# Altium PCB PCB1.PcbDoc
Units mil, origin at the board's own origin, x right, y up, seen from the top; angles counter-clockwise.
Board outline 3275 x 2940 mil, 2 copper layers (Top Layer, Bottom Layer); 3 components, 9 nets, 61 pads, 0 vias.
Unrouted connection lines stored in the file: 12.
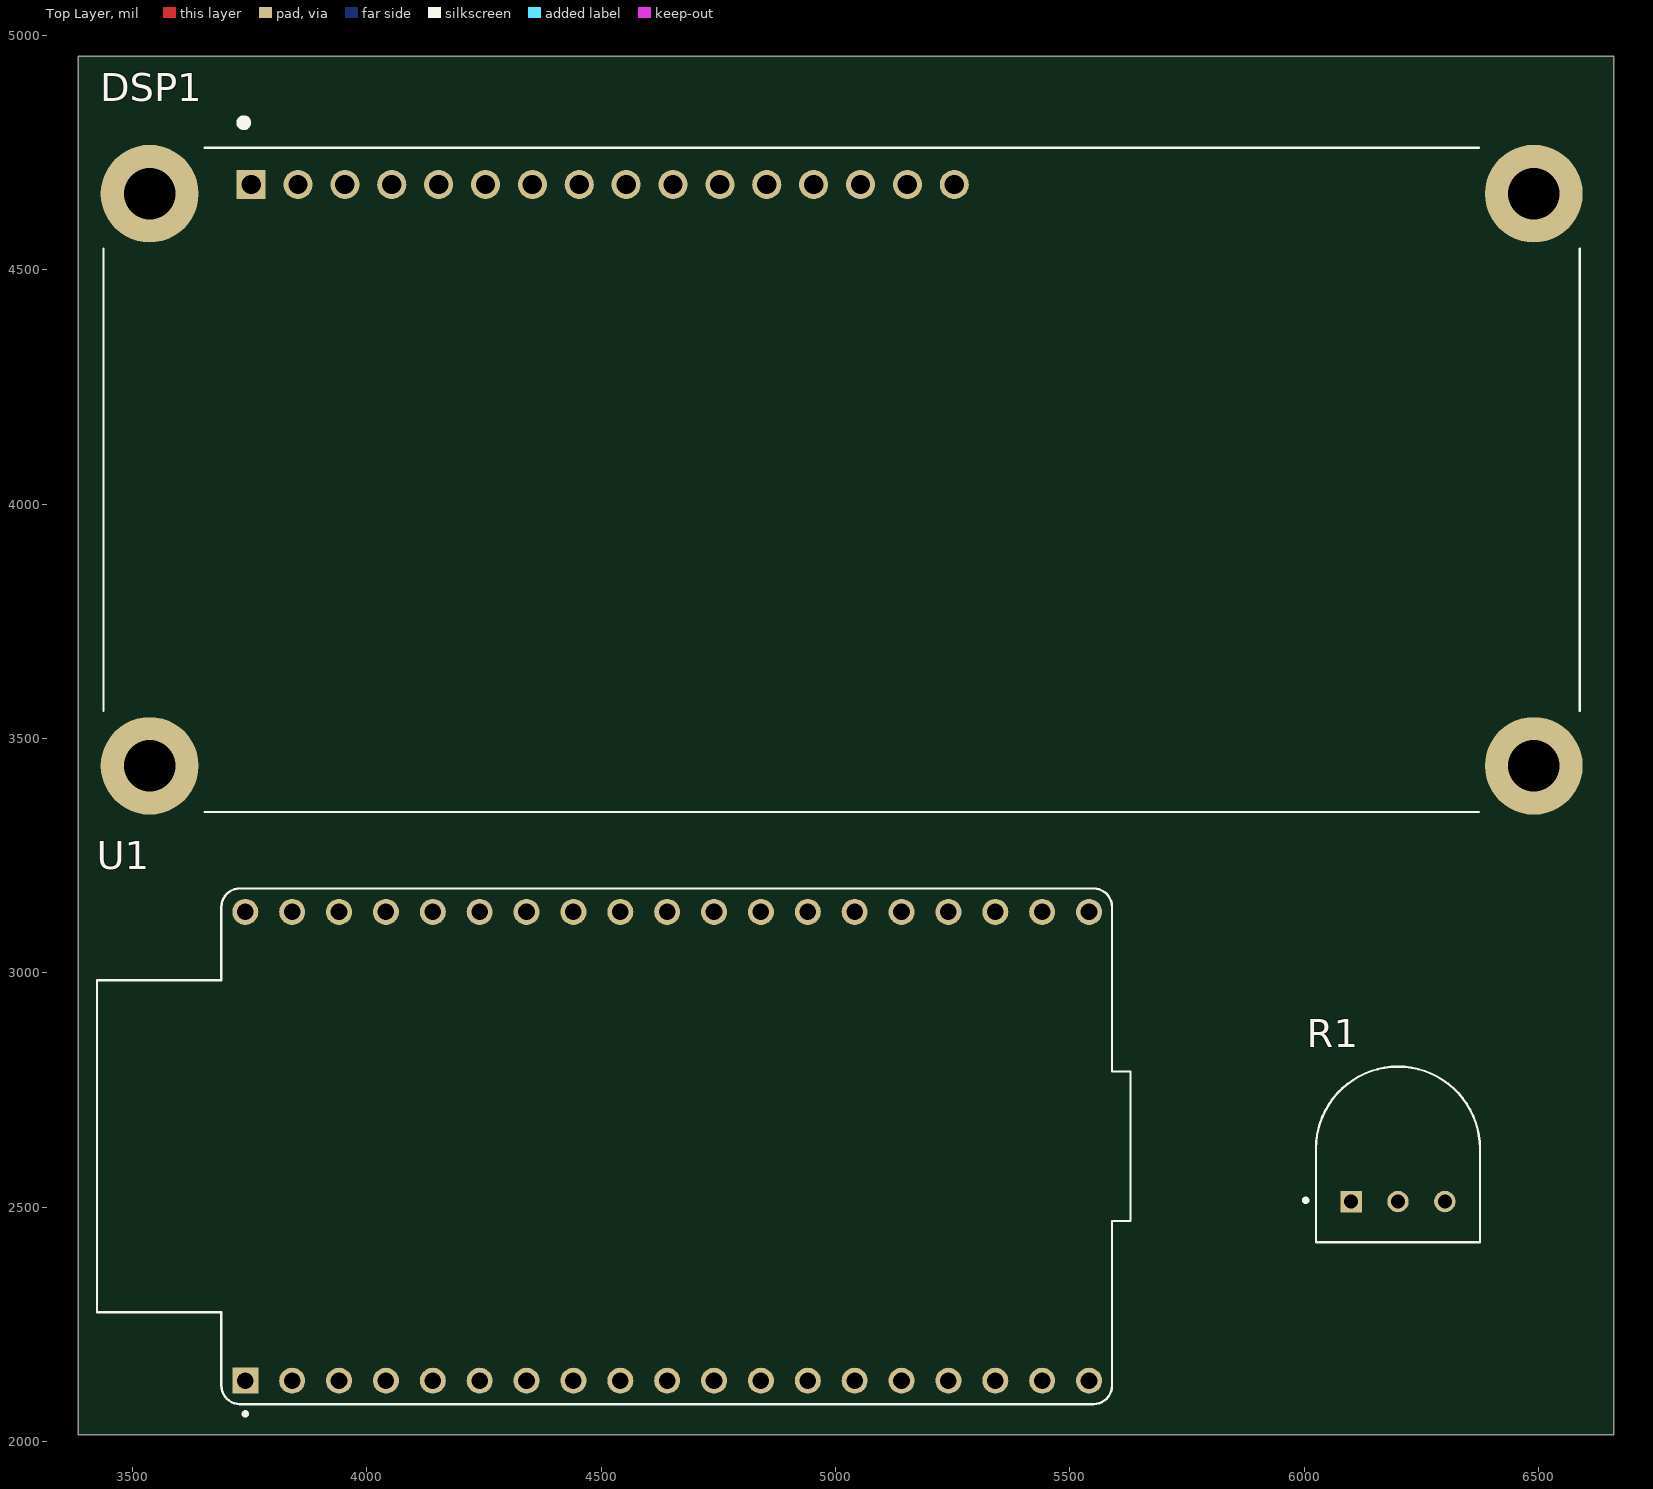
[diagram p0: Top Layer view]
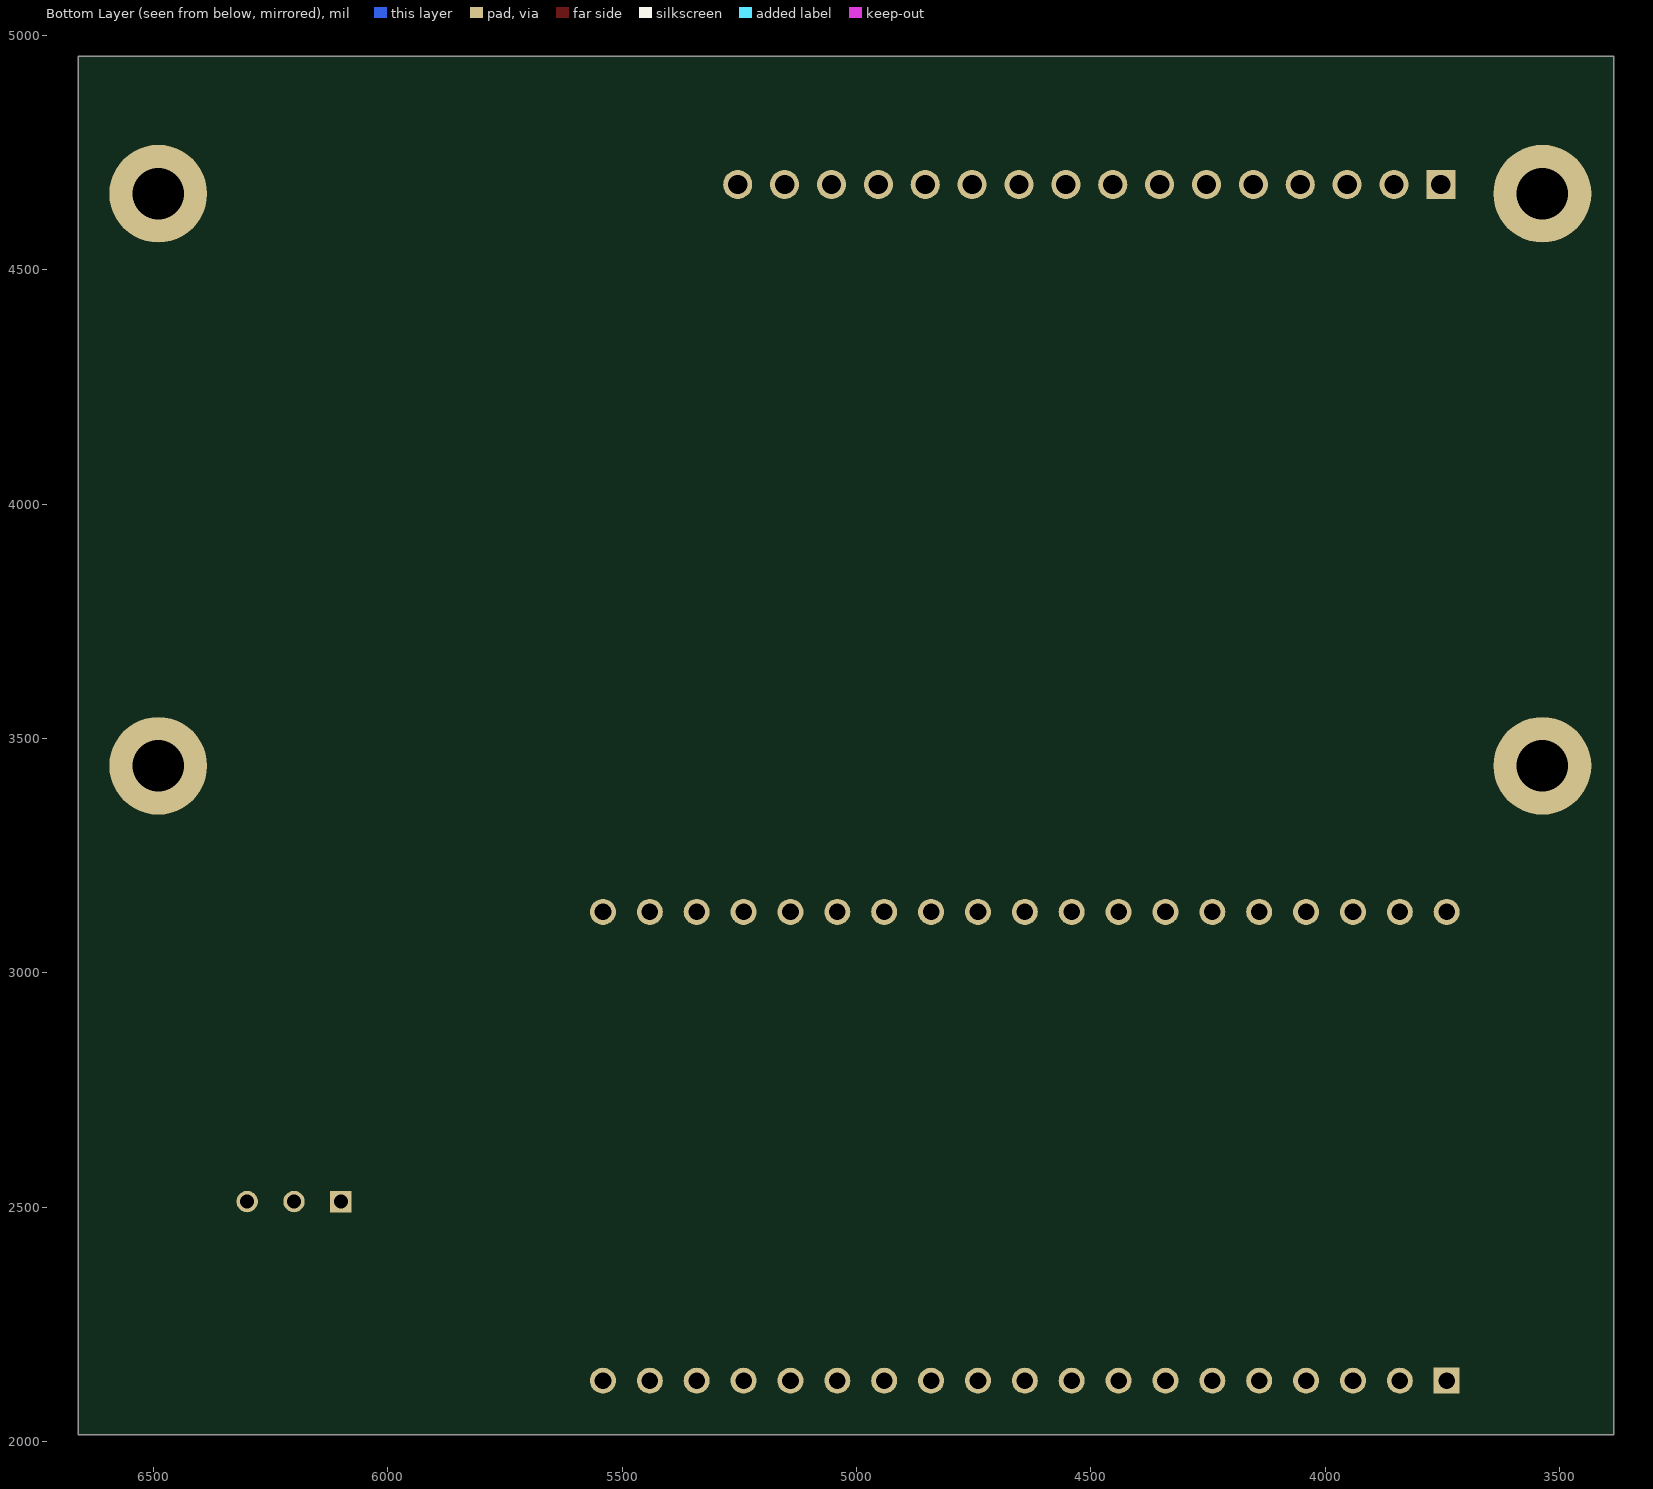
[diagram p1: Bottom Layer view, seen from below]

## Layer stack, top to bottom
Top Solder: solder mask 0.4, Solder Resist, Dk 3.5
Top Layer: signal copper 1.4
Dielectric 1: dielectric 12.6, FR-4, Dk 4.8
Bottom Layer: signal copper 1.4
Bottom Solder: solder mask 0.4, Solder Resist, Dk 3.5

## Board outline
3385,2015 6660,2015 6660,4955 3385,4955

## Design rules (kind name [scope] priority, off if disabled: settings)
Clearance [All] p1: gap=10 ignorepadtopadclearanceinfootprint=FALSE
PolygonConnect [All] p1: connectstyle=Relief reliefconductorwidth=10 reliefentries=4 polygonreliefangle="90 Angle" airgapwidth=10
RoutingVias [All] p1: holewidth=28 width=50 viastyle="Through Hole" minholewidth=28 minwidth=50 maxholewidth=28 maxwidth=50
SolderMaskExpansion [All] p1: expansion=4 istentingtop=FALSE
SupplyNets "Schematic Supply Nets_1" [InNet('VCC')] p1: voltage=0.000
SupplyNets "Schematic Supply Nets" [InNet('GND')] p2: voltage=0.000
Width [All] p1: maxlimit=10 minlimit=10 preferedwidth=10
30 further rules are at their usual default settings.

## Components (designator, comment, footprint, x,y, rotation, side; value= is the part's Value field where it differs from the comment)
DSP1 "NHD-14432WG-BTFH-V#T" LCD_NHD-14432WG-BTFH-V#T 5035,4040 r0 top
R1 "3352T-1-200" TRIM_3352T-1-200 6200,2625 r0 top
U1 "ESP32-DEVKITC-32E" MODULE_ESP32-DEVKITC-32E 4640,2630 r90 top

## Footprints (in the part's own frame and the unit in brackets; to place one, negate y for a bottom-side part, rotate by r counter-clockwise, add the part's x,y. Pads: shape width x height; smd on the part's side, far side on the other; paste and mask are expansions set on the pad)
LCD_NHD-14432WG-BTFH-V#T [mm]
  rect 1.575x1.575 / inner round 1.575 / far side rect 1.575x1.575 hole 1.05: 1(-32.55,16.3)
  round 1.575 hole 1.05: 2(-30.01,16.3) 3(-27.47,16.3) 4(-24.93,16.3) 5(-22.39,16.3) 6(-19.85,16.3) 7(-17.31,16.3) 8(-14.77,16.3) 9(-12.23,16.3) 10(-9.69,16.3) 11(-7.15,16.3) 12(-4.61,16.3) 13(-2.07,16.3) 14(0.47,16.3) 15(3.01,16.3) 16(5.55,16.3)
  round 5.3 hole 2.8: S1(-38.05,15.8) S2(-38.05,-15.2) S3(36.95,15.8) S4(36.95,-15.2)
  silkscreen extent -40.55,-17.7 39.45,19.85, body extent -40,-18 40,18, height 10.2
MODULE_ESP32-DEVKITC-32E [mm]
  rect 1.408x1.408 / inner round 1.408 / far side rect 1.408x1.408 hole 0.9: J2_1(-12.7,22.835)
  round 1.408 hole 0.9: J2_2(-12.7,20.295) J2_3(-12.7,17.755) J2_4(-12.7,15.215) J2_5(-12.7,12.675) J2_6(-12.7,10.135) J2_7(-12.7,7.595) J2_8(-12.7,5.055) J2_9(-12.7,2.515) J2_10(-12.7,-0.025) J2_11(-12.7,-2.565) J2_12(-12.7,-5.105) J2_13(-12.7,-7.645) J2_14(-12.7,-10.185) J2_15(-12.7,-12.725) J2_16(-12.7,-15.265) J2_17(-12.7,-17.805) J2_18(-12.7,-20.345) J2_19(-12.7,-22.885) J3_1(12.7,22.835) J3_2(12.7,20.295) J3_3(12.7,17.755) J3_4(12.7,15.215) J3_5(12.7,12.675) J3_6(12.7,10.135) J3_7(12.7,7.595) J3_8(12.7,5.055) J3_9(12.7,2.515) J3_10(12.7,-0.025) J3_11(12.7,-2.565) J3_12(12.7,-5.105) J3_13(12.7,-7.645) J3_14(12.7,-10.185) J3_15(12.7,-12.725) J3_16(12.7,-15.265) J3_17(12.7,-17.805) J3_18(12.7,-20.345) J3_19(12.7,-22.885)
  silkscreen extent -14.6,-25.13 13.97,30.87, body extent -13.97,-24.8 13.97,30.3, height 6.69
TRIM_3352T-1-200 [mm]
  rect 1.16x1.16 hole 0.76: 1(-2.54,-2.87)
  round 1.16 hole 0.76: 2(0,-2.87) 3(2.54,-2.87)
  silkscreen extent -5.1,-5.08 4.44,4.44, body extent -4.44,-5.08 4.44,4.44, height 4.32

## Part data
DSP1: "- Graphic LCD Display Module Transflective Black (White - Inverted) FSTN - Film Super-Twisted Nematic Parallel, 8-Bit - 144 x 32", Package=None, Availability="In Stock", Check_prices=https://www.snapeda.com/parts/NHD-14432WG-BTFH-V%23T/Newhaven+Display+Intl/view-part/?ref=eda, MF="Newhaven Display", MP=NHD-14432WG-BTFH-V#T, Price=None, Purchase-URL=https://pricing.snapeda.com/search/part/NHD-14432WG-BTFH-V#T/?ref=eda, SnapEDA_Link=https://www.snapeda.com/parts/NHD-14432WG-BTFH-V%23T/Newhaven+Display+Intl/view-part/?ref=snap
R1: "20 Ohms 0.5W, 1/2W Through Hole Thumbwheel Potentiometer Top Adjustment", Package="3352T-3 Bourns", Availability="In Stock", Check_prices=https://www.snapeda.com/parts/3352T-1-200/Bourns/view-part/?ref=eda, MF=Bourns, MP=3352T-1-200, Price=None, Purchase-URL=https://pricing.snapeda.com/search/part/3352T-1-200/?ref=eda, SnapEDA_Link=https://www.snapeda.com/parts/3352T-1-200/Bourns/view-part/?ref=snap
U1: "The ESP32-DEVKITC-32E transceiver evaluation board from Espressif Systems is a powerful development tool for wireless communication technologies. It supports 802.11 b/g/n Wi-Fi and BluetoothÂ® Smart Ready 4.x (BLE) dual-mode at 2.4GHz, making it ideal for", Package=None, Check_prices=https://www.snapeda.com/parts/ESP32-DEVKITC-32E/Espressif+Systems/view-part/?ref=eda, MF="Espressif Systems", MP=ESP32-DEVKITC-32E, SnapEDA_Link=https://www.snapeda.com/parts/ESP32-DEVKITC-32E/Espressif+Systems/view-part/?ref=snap

## Nets (pads, with @x,y where several pads share a name; then routed paths per layer and width w, separated by ;. In a path a pad name is that pad's centre, name@x,y a point inside that pad or via, vN(x,y) a via of type N, cw(c..) or ccw(c..) an arc to the next point about the centre after c; other vN are vias at no path point)
GND: DSP1.1 DSP1.5 DSP1.16 R1.1 U1.J3_1
NetDSP1_3: DSP1.3 R1.2
NetDSP1_4: DSP1.4 U1.J3_6
NetDSP1_6: DSP1.6 U1.J3_8
NetDSP1_11: DSP1.11 U1.J3_9
NetDSP1_12: DSP1.12 U1.J3_10
NetDSP1_13: DSP1.13 U1.J3_11
NetDSP1_14: DSP1.14 U1.J3_12
VCC: DSP1.2 DSP1.15
pads on no net: DSP1.7 DSP1.8 DSP1.9 DSP1.10 DSP1.S1 DSP1.S2 DSP1.S3 DSP1.S4 R1.3 U1.J2_1 U1.J2_2 U1.J2_3 U1.J2_4 U1.J2_5 U1.J2_6 U1.J2_7 U1.J2_8 U1.J2_9 U1.J2_10 U1.J2_11 U1.J2_12 U1.J2_13 U1.J2_14 U1.J2_15 U1.J2_16 U1.J2_17 U1.J2_18 U1.J2_19 U1.J3_2 U1.J3_3 U1.J3_4 U1.J3_5 U1.J3_7 U1.J3_13 U1.J3_14 U1.J3_15 U1.J3_16 U1.J3_17 U1.J3_18 U1.J3_19